# EAGLE board with ui  Final Project - Simon Says (EAGLE 9.7.0)

Size 320.78 x 279.44 mm. Coordinates in mm from the lower left corner, seen from the top.
Outline: 0,0 320.78,0 320.78,279.44 0,279.44 0,0
Copper layers (1*16): Top 0.035mm / dielectric 1.5mm / Bottom 0.035mm
Design rules "default": minimum track width 6mil, minimum drill 0.35mm, track to track 6mil, track to pad 6mil, pad to pad 6mil, via to via 6mil, smd to smd 6mil, copper to edge 40mil, drill to drill 6mil, minimum pad ring 10mil, minimum via ring 8mil, stop-mask expansion 4mil, vias tented up to drill 0mil, thermal gap 10mil

## Footprints (pad centres in the part's own frame; a part is rotated, then mirrored left to right if it is on the bottom)
LEDRD254W60D565H860B = drill 0.981 pad 1.581: 1 -1.27,0; 2 1.27,0
LEDRD254W60D565H860B_Y = drill 0.981 pad 1.581: 1 -1.27,0; 2 1.27,0
LEDRD254W60D565H860B_G = drill 0.981 pad 1.581: 1 -1.27,0; 2 1.27,0
LEDRD254W60D565H860B_B = drill 0.981 pad 1.581: 1 -1.27,0; 2 1.27,0
PIEZO = drill 1 pad 1.6: 1 -3.5,0; 2 3.5,0
RESAD1016W63L850D250B = drill 0.83 pad 1.43: 1 -5.08,0; 2 5.08,0
HA-06-SM065 = drill 1 pad 1.676: 1 -2.54,-2.54; 2 0,2.54; 3 2.54,-2.54
SWITCH-MOMENTARY-PTH-6.5MM = drill 1.016 pad 1.88: 1 -3.251,2.261; 2 3.251,2.261; 3 -3.251,-2.261; 4 3.251,-2.261
ARDUINO-UNO-R3-SHIELD = drill 1.016 pad 1.88: 3.3V 24.13,-2.54; 5V 24.13,0; A0 24.13,12.7; A1 24.13,15.24; A2 24.13,17.78; A3 24.13,20.32; A4 24.13,22.86; A5 24.13,25.4; AREF -24.13,-13.97; D2 -24.13,20.32; D3 -24.13,17.78; D4 -24.13,15.24; D5 -24.13,12.7; D6 -24.13,10.16; D7 -24.13,7.62; D8 -24.13,3.81; D9 -24.13,1.27; D10 -24.13,-1.27; D11 -24.13,-3.81; D12 -24.13,-6.35; D13 -24.13,-8.89; GND@0 24.13,2.54; GND@1 24.13,5.08; GND@2 -24.13,-11.43; IOREF 24.13,-7.62; NC 24.13,-10.16; RES 24.13,-5.08; RX -24.13,25.4; SCL -24.13,-19.05; SDA -24.13,-16.51; TX -24.13,22.86; VIN 24.13,7.62
JHD-162A = drill 1.016 long: 1 -19.05,0; 2 -16.51,0; 3 -13.97,0; 4 -11.43,0; 5 -8.89,0; 6 -6.35,0; 7 -3.81,0; 8 -1.27,0; 9 1.27,0; 10 3.81,0; 11 6.35,0; 12 8.89,0; 13 11.43,0; 14 13.97,0; 15 16.51,0; 16 19.05,0
LCD-I2C = drill 1.016 long: 1 -19.05,-5.08; 2 -19.05,-7.62; 3 -19.05,-10.16; 4 -19.05,-12.7

## Placement (x,y rotation side)
D0  RED  [LEDRD254W60D565H860B]  213.94,240.14 0 top
D1  YELLOW  [LEDRD254W60D565H860B_Y]  198.7,240.14 0 top
D2  GREEN  [LEDRD254W60D565H860B_G]  183.46,240.14 0 top
D3  BLUE  [LEDRD254W60D565H860B_B]  168.22,240.14 0 top
PIEZO1  PIEZO  [PIEZO]  154.69,265.86 0 top
R1  330  [RESAD1016W63L850D250B]  215.21,250.3 90 top
R2  330  [RESAD1016W63L850D250B]  184.73,250.3 90 top
R3  330  [RESAD1016W63L850D250B]  199.97,250.3 90 top
R4  330  [RESAD1016W63L850D250B]  169.49,250.3 90 top
R5  220  [RESAD1016W63L850D250B]  283.75,86.16 270 top
RPOT1  250k  [HA-06-SM065]  136.69,222.52 90 top
RPOT3  250k  [HA-06-SM065]  243.11,60.76 0 top
SBLUE  SWITCH_MOMENTARY  [SWITCH-MOMENTARY-PTH-6.5MM]  177.11,233.79 90 top
SGREEN  SWITCH_MOMENTARY  [SWITCH-MOMENTARY-PTH-6.5MM]  192.35,233.79 90 top
SRED  SWITCH_MOMENTARY  [SWITCH-MOMENTARY-PTH-6.5MM]  222.83,233.79 90 top
SYELLOW  SWITCH_MOMENTARY  [SWITCH-MOMENTARY-PTH-6.5MM]  207.59,233.79 90 top
U1  ARDUINO-UNO-R3-SHIELD  [ARDUINO-UNO-R3-SHIELD]  170.79,166.02 270 top
U2  ARDUINO-UNO-R3-SHIELD  [ARDUINO-UNO-R3-SHIELD]  182.18,70.79 270 top
U3  LCD-16X2JHD-162A  [JHD-162A]  265.15,36.63 0 top
U4  LCD-16X2-I2CSUNFOUNDER-IIC  [LCD-I2C]  30.73,234.29 0 top

## Library data of the parts
D0 = Tinkercad; CATEGORY: Opto-Electronic; SUB-CATEGORY: LED; VALUE: LED_RED
D1 = Tinkercad; CATEGORY: Opto-Electronic; SUB-CATEGORY: LED; VALUE: LED_YELLOW
D2 = Tinkercad; CATEGORY: Opto-Electronic; SUB-CATEGORY: LED; VALUE: LED_GREEN
D3 = Tinkercad; CATEGORY: Opto-Electronic; SUB-CATEGORY: LED; VALUE: LED_BLUE
PIEZO1 R1-R5 RPOT1 RPOT3 SBLUE SGREEN SRED SYELLOW U1-U4 = Tinkercad

## Nets
D0_C: D0.2 R1.1
D1_C: D1.2 R3.1
D2_C: D2.2 R2.1
D3_C: D3.2 R4.1
PIEZO1_2: PIEZO1.2 RPOT1.3
U1_5V: U1.5V U4.2
U1_D2: SRED.3 SRED.4 U1.D2
U1_D3: D0.1 U1.D3
U1_D4: SYELLOW.3 SYELLOW.4 U1.D4
U1_D5: D1.1 U1.D5
U1_D6: SGREEN.3 SGREEN.4 U1.D6
U1_D7: D2.1 U1.D7
U1_D8: SBLUE.3 SBLUE.4 U1.D8
U1_D9: D3.1 U1.D9
U1_D10: PIEZO1.1 U1.D10
U1_GND: R1.2 R2.2 R3.2 R4.2 RPOT1.2 RPOT3.3 SBLUE.1 SBLUE.2 SGREEN.1 SGREEN.2 SRED.1 SRED.2 SYELLOW.1 SYELLOW.2 U1.GND@0 U1.GND@1 U1.GND@2 U2.GND@0 U2.GND@1 U2.GND@2 U3.1 U3.5 U3.16 U4.1
U1_SCL: U1.SCL U4.4
U1_SDA: U1.SDA U4.3
U2_5V: R5.1 RPOT3.1 U2.5V U3.2
U2_D2: U2.D2 U3.14
U2_D3: U2.D3 U3.13
U2_D4: U2.D4 U3.12
U2_D5: U2.D5 U3.11
U2_D11: U2.D11 U3.6
U2_D12: U2.D12 U3.4
U2_RX: U1.TX U2.RX
U2_TX: U1.RX U2.TX
U3_LED+: R5.2 U3.15
U3_VO: RPOT3.2 U3.3

## Tracks (layer width: path | path; a pad name or v marks a point on that pad's centre or on a via)
D0_C  (1 unrouted)
D1_C  (1 unrouted)
D2_C  (1 unrouted)
D3_C  (1 unrouted)
PIEZO1_2  (1 unrouted)
U1_5V  (1 unrouted)
U1_D2  (2 unrouted)
U1_D3  (1 unrouted)
U1_D4  (2 unrouted)
U1_D5  (1 unrouted)
U1_D6  (2 unrouted)
U1_D7  (1 unrouted)
U1_D8  (2 unrouted)
U1_D9  (1 unrouted)
U1_D10  (1 unrouted)
U1_GND  (23 unrouted)
U1_SCL  (1 unrouted)
U1_SDA  (1 unrouted)
U2_5V  (3 unrouted)
U2_D2  (1 unrouted)
U2_D3  (1 unrouted)
U2_D4  (1 unrouted)
U2_D5  (1 unrouted)
U2_D11  (1 unrouted)
U2_D12  (1 unrouted)
U2_RX  (1 unrouted)
U2_TX  (1 unrouted)
U3_LED+  (1 unrouted)
U3_VO  (1 unrouted)